# Altium PCB PCB1.PcbDoc
Units mm, origin at the board's own origin, x right, y up, seen from the top; angles counter-clockwise.
Board outline 98.42 x 98.3 mm, 2 copper layers (Top Layer, Bottom Layer); 126 components, 87 nets, 280 pads, 4 vias.
Unrouted connection lines stored in the file: 1.
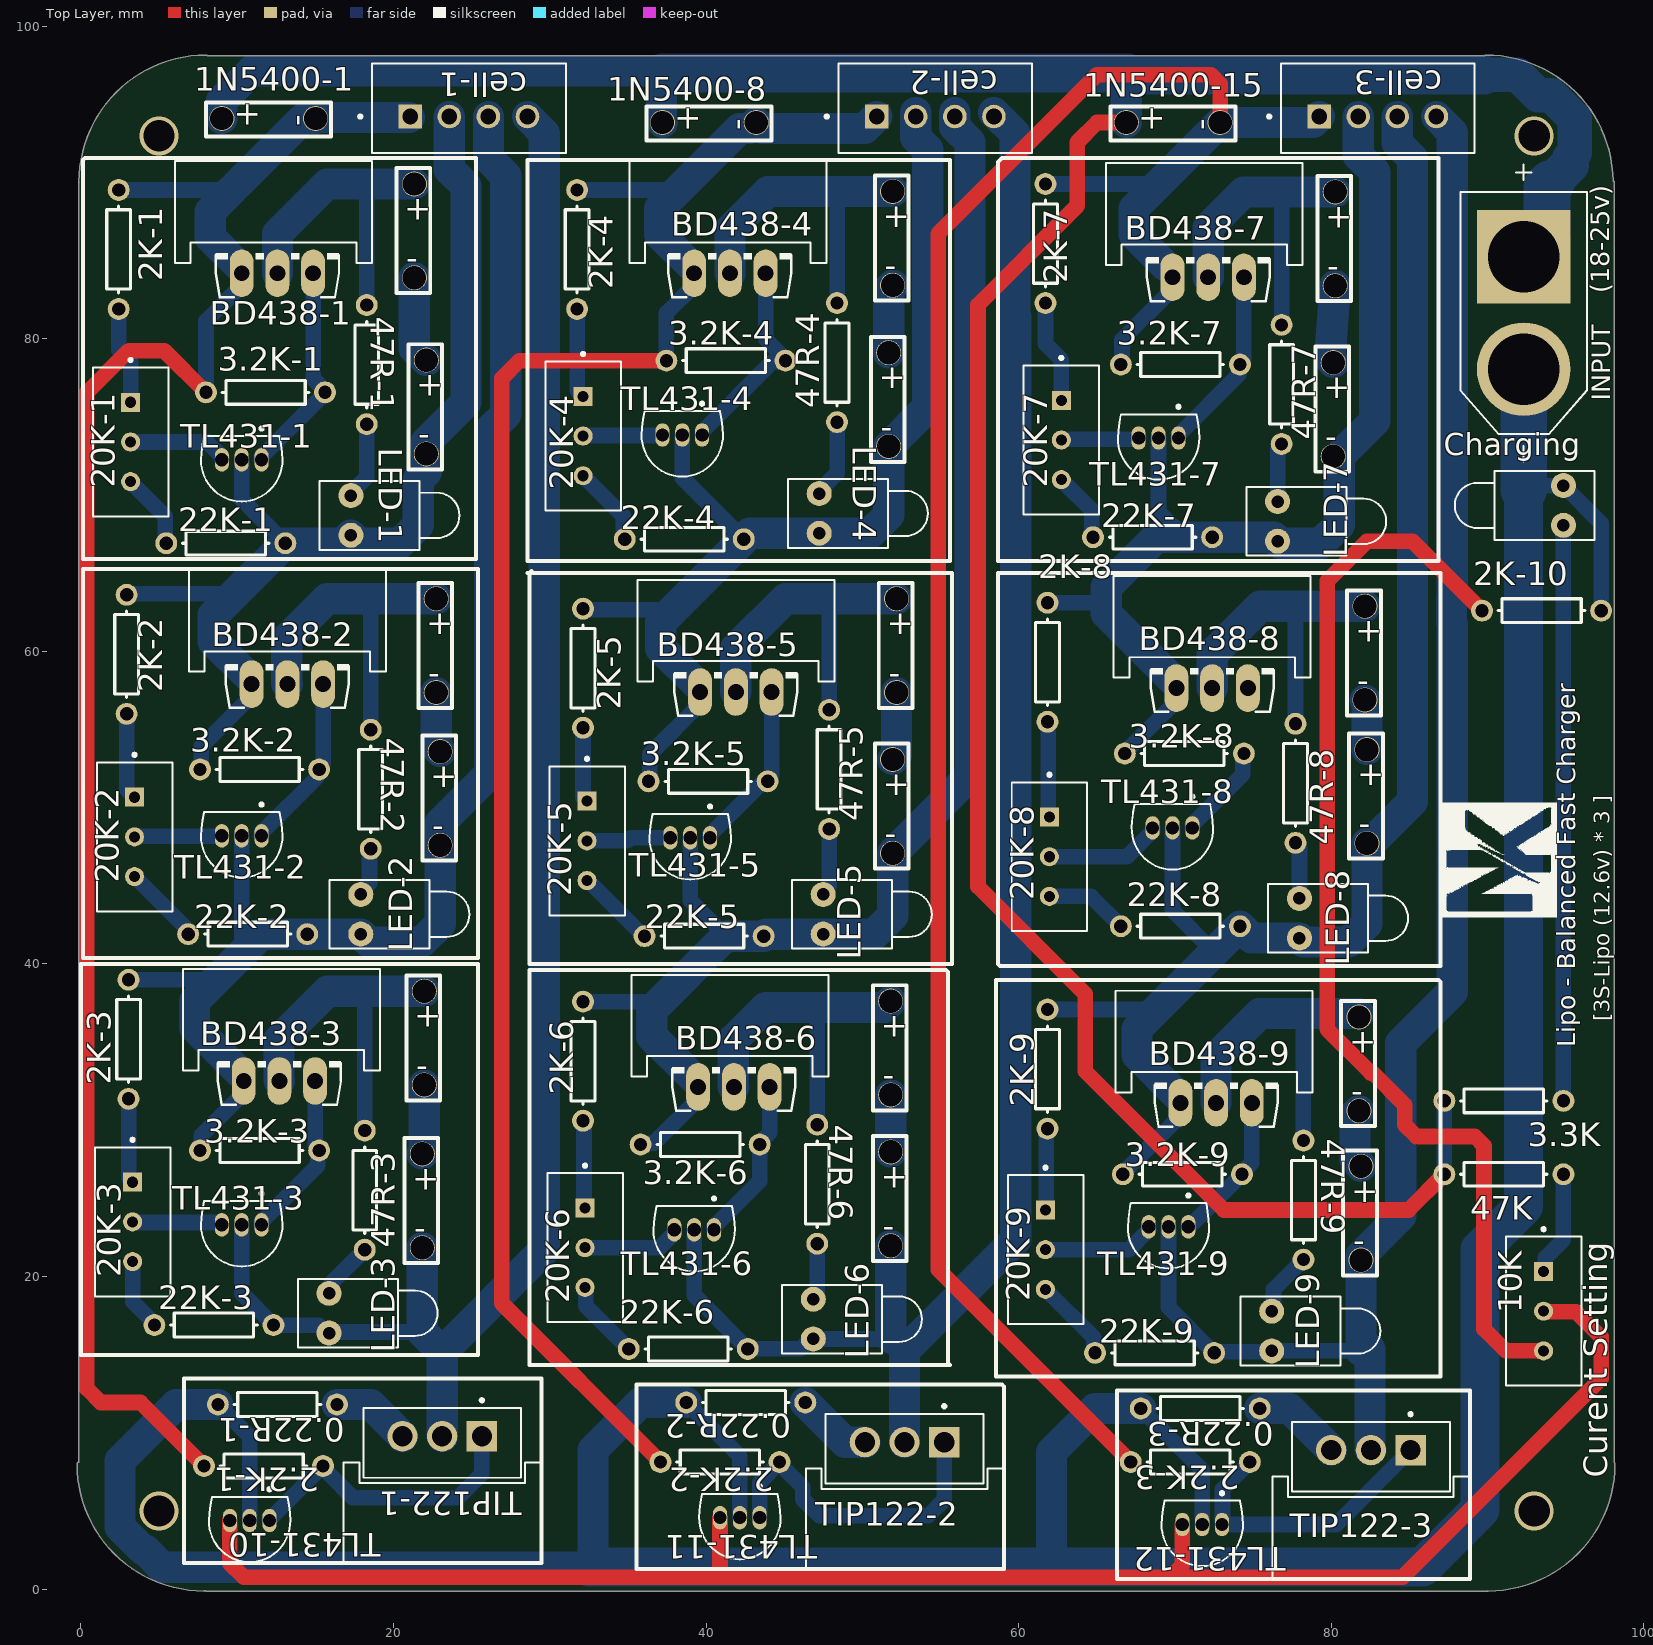
[diagram p0: Top Layer view]
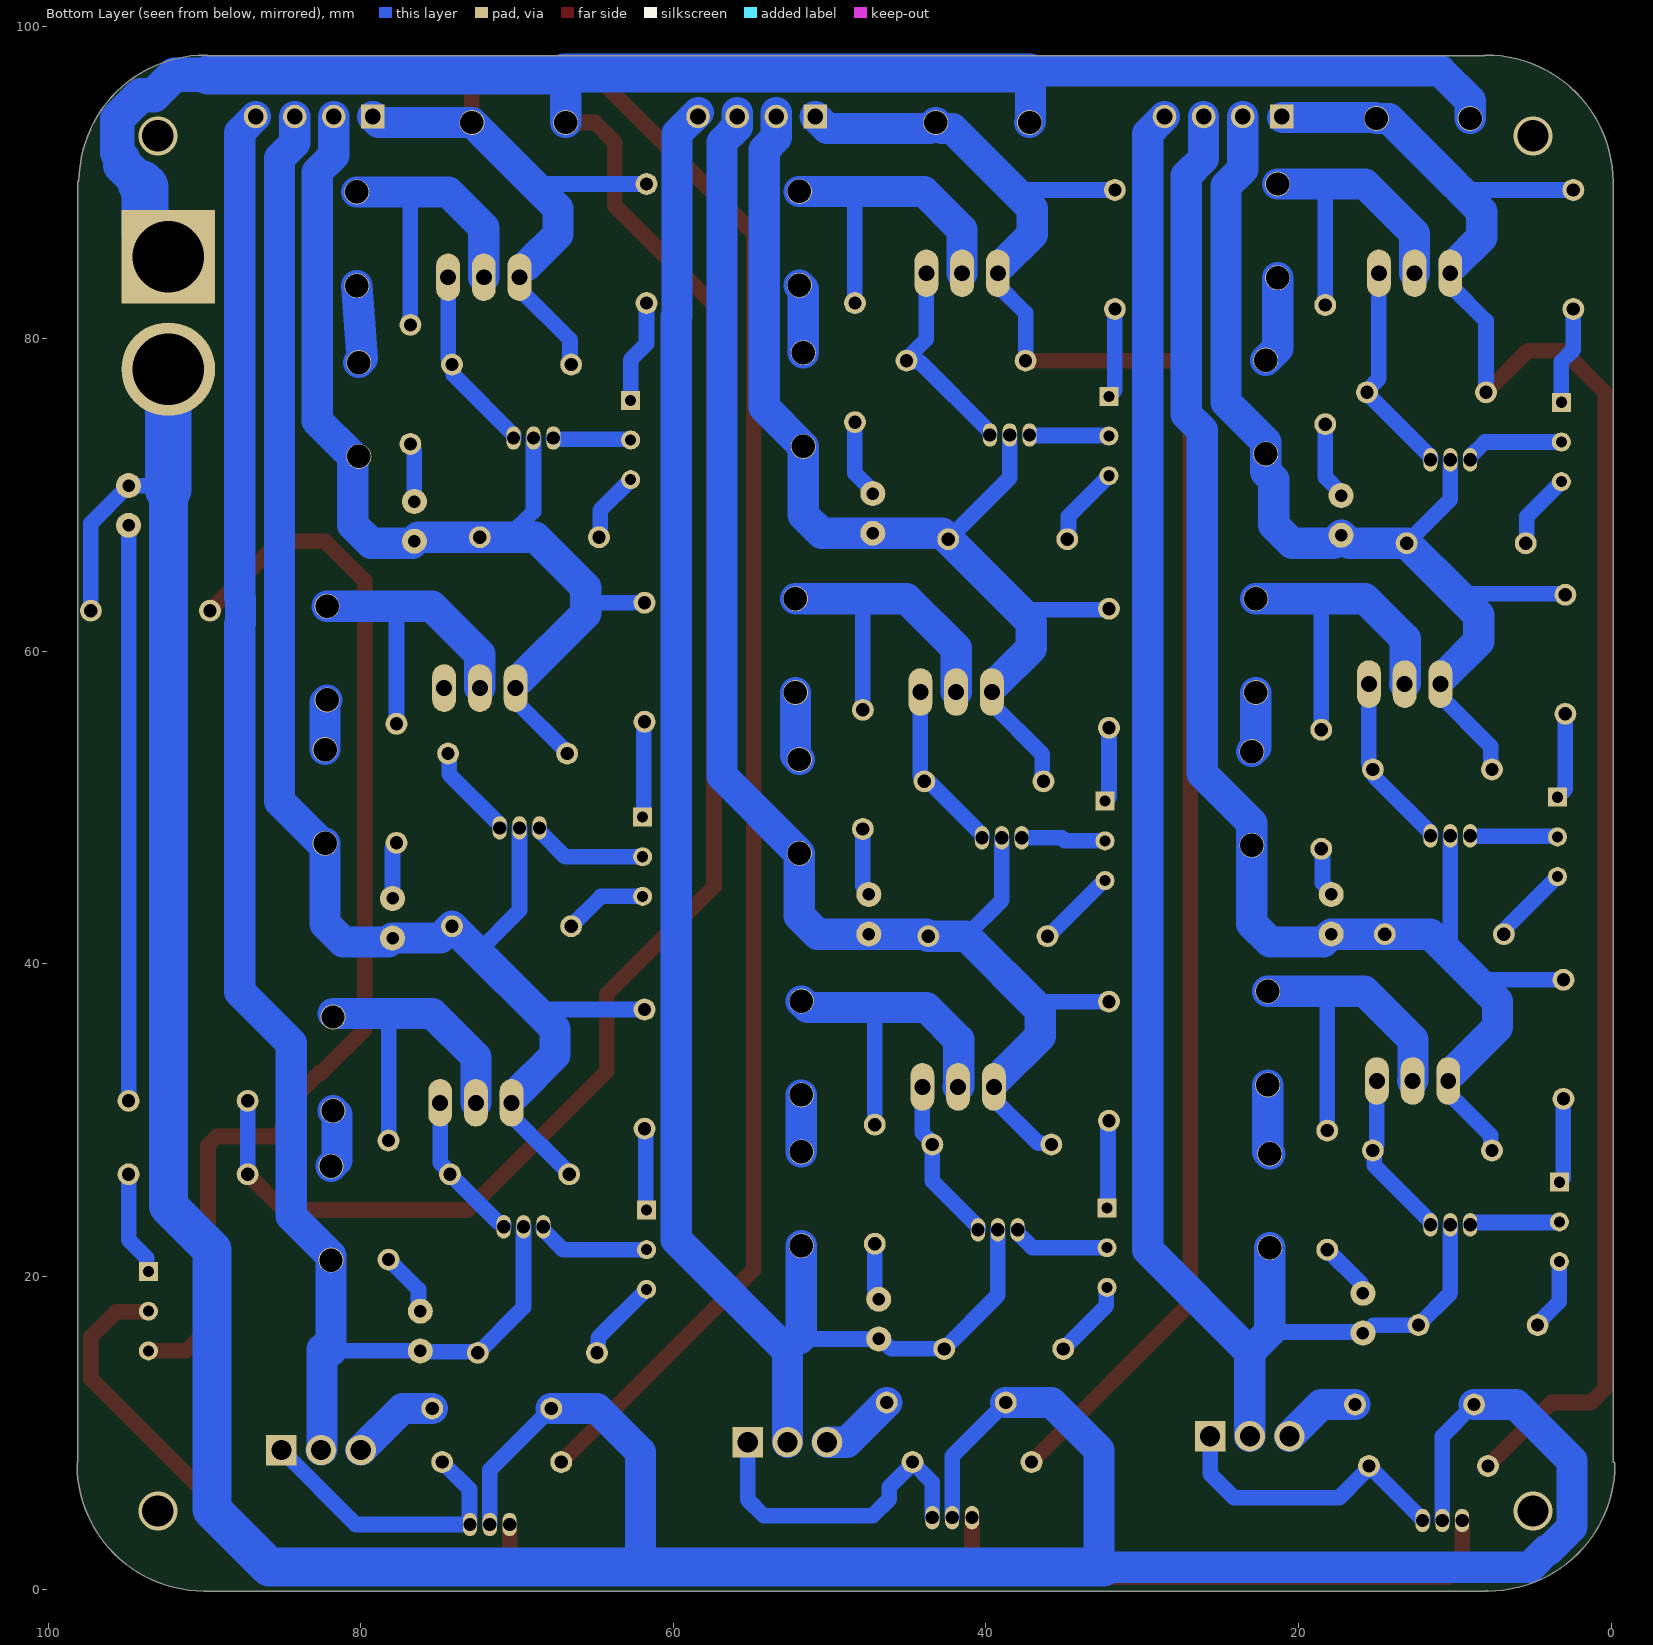
[diagram p1: Bottom Layer view, seen from below]

## Layer stack, top to bottom
Top Solder: solder mask 0.0102, Solder Resist, Dk 3.5
Top Layer: signal copper 0.0356
Dielectric 1: dielectric 0.32, FR-4, Dk 4.8
Bottom Layer: signal copper 0.0356
Bottom Solder: solder mask 0.0102, Solder Resist, Dk 3.5

## Board outline
7.874,-0.126 ccw(c7.874,0.001) 7.936,-0.11 ccw(c8,0) 8,-0.127 90,-0.127 ccw(c90,0) 90.024,-0.125 ccw(c90.043,0.001) 90.043,-0.126 ccw(c90.043,8.001) 98.17,8.001 ccw(c98.043,8.001) 98.127,8.096 98.127,90 ccw(c98,90) 98.043,90.12 ccw(c89.916,90.043) 89.916,98.17 ccw(c89.916,98.043) 89.821,98.127 8.096,98.127 ccw(c8.001,98.043) 8.001,98.17 ccw(c8.001,90.043) -0.126,90.043 ccw(c0.001,90.043) -0.125,90.024 ccw(c0,90) -0.127,90 -0.127,8.128 ccw(c-0.126,8.001) -0.253,8.001 ccw(c7.874,8.001)

## Design rules (kind name [scope] priority, off if disabled: settings)
Clearance [All] p1: gap=0.254 ignorepadtopadclearanceinfootprint=FALSE except(0: Arc-Hole Track-Hole SMDPad-Hole THPad-Hole Via-Hole Fill-Hole Poly-Hole Region-Hole Text-Hole)
PolygonConnect [All] p1: connectstyle=Relief reliefconductorwidth=0.254 reliefentries=4 polygonreliefangle="90 Angle" airgapwidth=0.254
RoutingVias [All] p1: holewidth=0.711 width=1.27 viastyle="Through Hole" minholewidth=0.711 minwidth=1.27 maxholewidth=0.711 maxwidth=1.27
SolderMaskExpansion [All] p1: expansion=0.102 istentingtop=FALSE
Width [All] p1: maxlimit=3 minlimit=0.254 preferedwidth=1 minimp=50.000000 maximp=50.000000 favimp=50.000000
30 further rules are at their usual default settings.

## Classes and differential pairs
component class Sheet2: 0.22R-1 0.22R-2 0.22R-3 1N5400-8 1N5400-15 2.2K-1 2.2K-2 2.2K-3 2K-1 2K-2 2K-3 2K-4 2K-5 2K-6 2K-7 2K-8 2K-9 2K-10 3.2K-1 3.2K-2 3.2K-3 3.2K-4 3.2K-5 3.2K-6 3.2K-7 3.2K-8 3.2K-9 3.3K 20K-1 20K-2 20K-3 20K-4 20K-5 20K-6 20K-7 20K-8 20K-9 22K-1 22K-2 22K-3 22K-4 22K-5 22K-6 22K-7 22K-8 22K-9 47K 47R-1 47R-2 47R-3 47R-4 47R-5 47R-6 47R-7 47R-8 47R-9 BD438-1 BD438-2 BD438-3 BD438-4 BD438-5 BD438-6 BD438-7 BD438-8 BD438-9 cell-1 cell-2 cell-3 Charging "Curent Setting" LED-1 LED-2 LED-3 LED-4 LED-5 LED-6 LED-7 LED-8 LED-9 TIP122-1 TIP122-2 TIP122-3 TL431-1 TL431-2 TL431-3 TL431-4 TL431-5 TL431-6 TL431-7 TL431-8 TL431-9 TL431-10 TL431-11 TL431-12

## Components (designator, comment, footprint, x,y, rotation, side; value= is the part's Value field where it differs from the comment)
0.22R-1 "" AXIAL-0.3 12.573,11.811 r0 top
0.22R-2 "" AXIAL-0.3 42.545,11.938 r0 top
0.22R-3 "" AXIAL-0.3 71.628,11.557 r0 top
1N5400-1 "" PCBComponent_1 9.017,94.107 r0 top
1N5400-2 "" PCBComponent_1 22.098,78.644 r270 top
1N5400-3 "" PCBComponent_1 21.336,89.916 r270 top
1N5400-4 "" PCBComponent_1 22.733,63.373 r270 top
1N5400-5 "" PCBComponent_1 22.987,53.594 r270 top
1N5400-6 "" PCBComponent_1 21.971,38.258 r270 top
1N5400-7 "" PCBComponent_1 21.844,27.844 r270 top
1N5400-8 "" PCBComponent_1 37.211,93.853 r0 top
1N5400-9 "" PCBComponent_1 51.943,89.439 r270 top
1N5400-10 "" PCBComponent_1 51.689,79.121 r270 top
1N5400-11 "" PCBComponent_1 52.197,63.373 r270 top
1N5400-12 "" PCBComponent_1 51.943,53.086 r270 top
1N5400-13 "" PCBComponent_1 51.816,37.623 r270 top
1N5400-14 "" PCBComponent_1 51.816,27.971 r270 top
1N5400-15 "" PCBComponent_1 66.898,93.853 r0 top
1N5400-16 "" PCBComponent_1 80.264,89.408 r270 top
1N5400-17 "" PCBComponent_1 80.137,78.486 r270 top
1N5400-18 "" PCBComponent_1 82.169,62.896 r270 top
1N5400-19 "" PCBComponent_1 82.296,53.721 r270 top
1N5400-20 "" PCBComponent_1 81.788,36.607 r270 top
1N5400-21 "" PCBComponent_1 81.915,27.051 r270 top
2.2K-1 "" AXIAL-0.3 11.684,7.874 r180 top
2.2K-2 "" AXIAL-0.3 40.894,8.128 r180 top
2.2K-3 "" AXIAL-0.3 70.993,8.128 r180 top
2K-1 "" AXIAL-0.3 2.413,85.725 r90 top
2K-2 "" AXIAL-0.3 2.921,59.817 r90 top
2K-3 "" AXIAL-0.3 3.048,35.179 r90 top
2K-4 "" AXIAL-0.3 31.75,85.725 r90 top
2K-5 "" AXIAL-0.3 32.131,58.928 r90 top
2K-6 "" AXIAL-0.3 32.131,33.782 r90 top
2K-7 "" AXIAL-0.3 61.722,86.106 r90 top
2K-8 "" AXIAL-0.3 61.849,59.309 r90 top
2K-9 "" AXIAL-0.3 61.849,33.274 r90 top
2K-10 "" AXIAL-0.3 93.472,62.611 r180 top
3.2K-1 "" AXIAL-0.3 11.811,76.581 r0 top
3.2K-2 "" AXIAL-0.3 11.43,52.451 r0 top
3.2K-3 "" AXIAL-0.3 11.43,28.067 r0 top
3.2K-4 "" AXIAL-0.3 41.275,78.613 r0 top
3.2K-5 "" AXIAL-0.3 40.132,51.689 r0 top
3.2K-6 "" AXIAL-0.3 39.624,28.448 r0 top
3.2K-7 "" AXIAL-0.3 70.358,78.359 r0 top
3.2K-8 "" AXIAL-0.3 70.612,53.467 r0 top
3.2K-9 "" AXIAL-0.3 70.485,26.543 r0 top
3.3K "" AXIAL-0.3 91.059,31.242 r180 top
20K-1 "" TRIM_3296W-FM1-502 3.175,73.406 r270 top
20K-2 "" TRIM_3296W-FM1-502 3.429,48.133 r270 top
20K-3 "" TRIM_3296W-FM1-502 3.302,23.495 r270 top
20K-4 "" TRIM_3296W-FM1-502 32.131,73.787 r270 top
20K-5 "" TRIM_3296W-FM1-502 32.385,47.879 r270 top
20K-6 "" TRIM_3296W-FM1-502 32.258,21.844 r270 top
20K-7 "" TRIM_3296W-FM1-502 62.738,73.533 r270 top
20K-8 "" TRIM_3296W-FM1-502 61.976,46.863 r270 top
20K-9 "" TRIM_3296W-FM1-502 61.722,21.717 r270 top
22K-1 "" AXIAL-0.3 9.271,66.929 r0 top
22K-2 "" AXIAL-0.3 10.668,41.91 r0 top
22K-3 "" AXIAL-0.3 8.509,16.891 r0 top
22K-4 "" AXIAL-0.3 38.608,67.183 r0 top
22K-5 "" AXIAL-0.3 39.878,41.783 r0 top
22K-6 "" AXIAL-0.3 38.862,15.367 r0 top
22K-7 "" AXIAL-0.3 68.58,67.31 r0 top
22K-8 "" AXIAL-0.3 70.358,42.418 r0 top
22K-9 "" AXIAL-0.3 68.707,15.113 r0 top
47K "" AXIAL-0.3 91.059,26.543 r180 top
47R-1 "" AXIAL-0.3 18.288,78.359 r270 top
47R-2 "" AXIAL-0.3 18.542,51.181 r270 top
47R-3 "" AXIAL-0.3 18.161,25.527 r270 top
47R-4 "" AXIAL-0.3 48.387,78.486 r270 top
47R-5 "" AXIAL-0.3 47.879,52.451 r270 top
47R-6 "" AXIAL-0.3 47.117,25.908 r270 top
47R-7 "" AXIAL-0.3 76.835,77.089 r270 top
47R-8 "" AXIAL-0.3 77.724,51.562 r270 top
47R-9 "" AXIAL-0.3 78.232,24.892 r270 top
BD438-1 "" TO126AV 12.573,85.471 r0 top
BD438-2 "" TO126AV 13.208,59.182 r0 top
BD438-3 "" TO126AV 12.7,33.782 r0 top
BD438-4 "" TO126AV 41.529,85.471 r0 top
BD438-5 "" TO126AV 41.91,58.674 r0 top
BD438-6 "" TO126AV 41.783,33.401 r0 top
BD438-7 "" TO126AV 72.136,85.217 r0 top
BD438-8 "" TO126AV 72.39,58.928 r0 top
BD438-9 "" TO126AV 72.644,32.385 r0 top
cell-1 "" JST_B4B-XH-A(LF)(SN) 24.825,94.759 r0 top
cell-2 "" JST_B4B-XH-A(LF)(SN) 54.677,94.759 r0 top
cell-3 "" JST_B4B-XH-A(LF)(SN) 82.991,94.759 r0 top
Charging "" LED-1 94.869,69.342 r180 top (schematic designator LED10)
"Curent Setting" "" TRIM_3296W-FM1-502 93.599,17.78 r270 top (schematic designator Curent(10K))
INPUT "" AMASS_XT60-M 92.329,81.661 r270 top
LED-1 "" LED-1 17.272,68.707 r0 top
LED-2 "" LED-1 17.907,43.18 r0 top
LED-3 "" LED-1 15.875,17.653 r0 top
LED-4 "" LED-1 47.244,68.834 r0 top
LED-5 "" LED-1 47.498,43.18 r0 top
LED-6 "" LED-1 46.863,17.272 r0 top
LED-7 "" LED-1 76.581,68.326 r0 top
LED-8 "" LED-1 77.978,42.926 r0 top
LED-9 "" LED-1 76.2,16.51 r0 top
TIP122-1 "" TO254P1009X445X1985-3 23.114,9.779 r180 top
TIP122-2 "" TO254P1009X445X1985-3 52.705,9.398 r180 top
TIP122-3 "" TO254P1009X445X1985-3 82.55,8.89 r180 top
TL431-1 "" TO-92 10.287,71.688 r180 top
TL431-2 "" TO-92 10.287,47.625 r180 top
TL431-3 "" TO-92 10.287,22.733 r180 top
TL431-4 "" TO-92 38.481,73.279 r180 top
TL431-5 "" TO-92 38.989,47.498 r180 top
TL431-6 "" TO-92 39.243,22.412 r180 top
TL431-7 "" TO-92 68.961,73.085 r180 top
TL431-8 "" TO-92 69.85,48.133 r180 top
TL431-9 "" TO-92 69.596,22.606 r180 top
TL431-10 "" TO-92 10.795,3.81 r180 top
TL431-11 "" TO-92 42.164,3.997 r180 top
TL431-12 "" TO-92 71.755,3.556 r180 top
? "Comment" HSINK_SK_95_25_STS_TO_220 82.55,3.302 r180 top
? "Comment" HSINK_SK_95_25_STS_TO_220 52.705,3.81 r180 top
? "Comment" HSINK_SK_95_25_STS_TO_220 23.114,4.191 r180 top
? "Comment" HSINK_SK_95_25_STS_TO_220 72.517,35.687 r0 top
? "Comment" HSINK_SK_95_25_STS_TO_220 41.529,36.703 r0 top
? "Comment" HSINK_SK_95_25_STS_TO_220 12.827,37.084 r0 top
? "Comment" HSINK_SK_95_25_STS_TO_220 72.39,62.23 r0 top
? "Comment" HSINK_SK_95_25_STS_TO_220 41.91,61.976 r0 top
? "Comment" HSINK_SK_95_25_STS_TO_220 13.208,62.611 r0 top
? "Comment" HSINK_SK_95_25_STS_TO_220 71.882,88.646 r0 top
? "Comment" HSINK_SK_95_25_STS_TO_220 41.402,88.773 r0 top
? "Comment" HSINK_SK_95_25_STS_TO_220 12.319,88.773 r0 top

## Footprints (in the part's own frame and the unit in brackets; to place one, negate y for a bottom-side part, rotate by r counter-clockwise, add the part's x,y. Pads: shape width x height; smd on the part's side, far side on the other; paste and mask are expansions set on the pad)
AMASS_XT60-M [mm]
  round 6 hole 4.55: N(3.6,0)
  rect 6x6 / inner round 6 / far side rect 6x6 hole 4.55: P(-3.6,0)
  silkscreen extent -9.5,-4.05 9.5,4.05, body extent -4.05,0 4.05,20.5, height 7.75
AXIAL-0.3 [mm] "Axial Device, Thru-Hole; 2 Leads; 0.3 in Pin Spacing"
  round 1.4 hole 0.85: 1(-3.81,0) 2(3.81,0)
  silkscreen extent -2.77,-0.76 2.77,0.76
HSINK_SK_95_25_STS_TO_220 [mm]
  round 0 all layers, no hole: 1(0,0)
  silkscreen extent -6.3,-3.9 6.3,2.6, body extent -6.3,-3.9 6.3,2.6, height 25
JST_B4B-XH-A(LF)(SN) [mm]
  rect 1.508x1.508 / inner round 1.508 / far side rect 1.508x1.508 hole 1: 1(-3.75,-0.525)
  round 1.508 hole 1: 2(-1.25,-0.525) 3(1.25,-0.525) 4(3.75,-0.525)
  silkscreen extent -7.05,-2.88 6.2,2.88, body extent -6.2,-2.88 6.2,2.88, height 7
LED-1 [mm] "LED; 2 Leads"
  round 1.6 hole 0.8: 1(0,1.27) 2(0,-1.27)
  silkscreen extent -2,-2.2 6.95,2.2
PCBComponent_1 [mm]
  round 1.6 hole 1.5: 1(0,0) 2(6,0)
  silkscreen extent -1.02,-1.14 6.98,1.02
TO126AV [mil]
  oval 60x120 hole 40: B(90,-50) C(0,-50) E(-90,-50)
  silkscreen extent -155,-110 155,0
TO254P1009X445X1985-3 [mm]
  rect 1.94x1.94 hole 1.29: 1(-2.54,0)
  round 1.94 hole 1.29: 2(0,0) 3(2.54,0)
  silkscreen extent -5.05,-2.4 5.05,2.66, body extent -5.05,-1.79 5.05,2.65, height 19.84
TO-92 [mm]
  oval 0.9x1.5 hole 0.85: 1(-1.27,-0.575) 2(0,-0.575) 3(1.27,-0.575)
  silkscreen extent -2.61,-2.67 2.61,2.09
TRIM_3296W-FM1-502 [mm]
  rect 1.218x1.218 hole 0.71: 1(-2.54,0)
  round 1.218 hole 0.71: 2(0,0) 3(2.54,0)
  silkscreen extent -5.35,-2.41 4.76,2.42

## Part data
0.22R-1 0.22R-2 0.22R-3 2.2K-1 2.2K-2 2.2K-3 2K-1 2K-2 2K-3 2K-4 2K-5 2K-6 2K-7 2K-8 2K-9 2K-10 3.2K-1 3.2K-2 3.2K-3 3.2K-4 3.2K-5 3.2K-6 3.2K-7 3.2K-8 3.2K-9 3.3K 22K-1 22K-2 22K-3 22K-4 22K-5 22K-6 22K-7 22K-8 22K-9 47K 47R-1 47R-2 47R-3 47R-4 47R-5 47R-6 47R-7 47R-8 47R-9: library part Res1, "Resistor", LatestRevisionDate=17-Jul-2002, LatestRevisionNote="Re-released for DXP Platform.", PackageDescription="Axial Device, Thru-Hole; 2 Leads; 0.3 in Pin Spacing", PackageReference=AXIAL-0.3, Published=8-Jun-2000, Publisher="Altium Limited"
1N5400-1 1N5400-2 1N5400-3 1N5400-4 1N5400-5 1N5400-6 1N5400-7 1N5400-8 1N5400-9 1N5400-10 1N5400-11 1N5400-12 1N5400-13 1N5400-14 1N5400-15 1N5400-16 1N5400-17 1N5400-18 1N5400-19 1N5400-20 1N5400-21: library part 1N5400-
20K-1 20K-2 20K-3 20K-4 20K-5 20K-6 20K-7 20K-8 20K-9 "Curent Setting": library part 3296W-FM1-502, "Trimmer Resistors - Through Hole", Package=None, Availability=Warning, Check_prices=https://www.snapeda.com/parts/3296W-FM1-502/Bourns/view-part/3211169/?ref=eda, MF=Bourns, MP=3296W-FM1-502, Price=None, SnapEDA_Link=https://www.snapeda.com/parts/3296W-FM1-502/Bourns/view-part/3211169/?ref=snap
BD438-1 BD438-2 BD438-3 BD438-4 BD438-5 BD438-6 BD438-7 BD438-8 BD438-9: library part BD438, "Bipolar (BJT) Transistor PNP 45V 4A 3MHz 36W Through Hole SOT-32-3", Package="TO-126 STMicroelectronics", Availability="In Stock", Check_prices=https://www.snapeda.com/parts/BD438/Onsemi/view-part/496837/?ref=eda, MF=ON, MP=BD438, Price=None, Purchase-URL=https://pricing.snapeda.com/search/part/BD438/?ref=eda, SnapEDA_Link=https://www.snapeda.com/parts/BD438/Onsemi/view-part/496837/?ref=snap
cell-1 cell-2 cell-3: library part B4B-XH-A(LF)(SN), "Connector Header Through Hole 4 position 0.098 (2.50mm)", Package=None, Availability="In Stock", Check_prices=https://www.snapeda.com/parts/B4B-XH-A(LF)(SN)/JST+Sales+America+Inc./view-part/?ref=eda, MF="JST Sales", MP=B4B-XH-A(LF)(SN), Price=None, Purchase-URL=https://pricing.snapeda.com/search/part/B4B-XH-A(LF)(SN)/?ref=eda, SnapEDA_Link=https://www.snapeda.com/parts/B4B-XH-A(LF)(SN)/JST+Sales+America+Inc./view-part/?ref=snap
Charging LED-1 LED-2 LED-3 LED-4 LED-5 LED-6 LED-7 LED-8 LED-9: library part LED1, "Typical RED GaAs LED", LatestRevisionDate=08-Jul-2005, LatestRevisionNote="Mech Layer 1 removed.", PackageDescription="LED; 2 Leads", PackageReference=LED-1, Published=8-Jun-2000, Publisher="Altium Limited"
INPUT: library part XT60-M, "Plug; DC supply; XT60; male; PIN: 2; for cable; soldered; 30A; 500V", Package=None, Availability="Not in stock", Check_prices=https://www.snapeda.com/parts/XT30UPB-M/AMASS/view-part/?ref=eda, MF=amass, MP=XT30UPB-M, Price=None, SnapEDA_Link=https://www.snapeda.com/parts/XT30UPB-M/AMASS/view-part/?ref=snap
TIP122-1 TIP122-2 TIP122-3: library part TIP122G, "Bipolar (BJT) Transistor NPN - Darlington 100V 5A 2W Through Hole TO-220AB", Package=None, Availability=Good, Check_prices=https://www.snapeda.com/parts/TIP122G/ON%20Semiconductor/view-part/385313/?ref=eda, MF="ON Semiconductor", MP=TIP122G, Price=None, Purchase-URL=https://pricing.snapeda.com/search/part/TIP122G/?ref=eda, SnapEDA_Link=https://www.snapeda.com/parts/TIP122G/ON%20Semiconductor/view-part/385313/?ref=snap
TL431-1 TL431-2 TL431-3 TL431-4 TL431-5 TL431-6 TL431-7 TL431-8 TL431-9 TL431-10 TL431-11 TL431-12: library part TL431CLP, "Adjustable precision shunt regulator 3-TO-92 0 to 70", Package=None, Availability=Unavailable, MP=TL431CLP, Price=None

## Via types
v1: diameter 2.5, hole 2, Top Layer to Bottom Layer, 4 vias

## Nets (pads, with @x,y where several pads share a name; then routed paths per layer and width w, separated by ;. In a path a pad name is that pad's centre, name@x,y a point inside that pad or via, vN(x,y) a via of type N, cw(c..) or ccw(c..) an arc to the next point about the centre after c; other vN are vias at no path point)
Net0.22R-1_1: 0.22R-1.1 0.22R-2.1 0.22R-3.1 2K-10.1 Charging.2 INPUT.N TL431-10.2 TL431-11.2 TL431-12.2 | length 242.6
  Bottom Layer w1: 0.22R-1.1 10.795,9.779 TL431-10.2 ; 0.22R-2.1 42.164,8.509 TL431-11.2 ; 0.22R-3.1 71.755,7.62 TL431-12.2 ; 92.329,70.358 92.569,70.598 93.853,70.598 94.855,70.598 Charging.2 97.282,68.199 2K-10.1
  Bottom Layer w2: 0.22R-1.1 6.096,11.811 2.496,8.211 2.496,3.963 3.963,2.496 4.108,2.496 5.207,1.397 32.512,1.397 32.766,1.651 32.766,8.89 35.814,11.938 0.22R-2.1 ; 61.976,1.397 62.103,1.524 62.103,8.763 64.897,11.557 0.22R-3.1
  Bottom Layer w2.5: 32.512,1.397 61.976,1.397 85.852,1.397 89.535,5.08 89.535,21.717 92.329,24.511 92.329,70.358
  Bottom Layer w3: 92.329,70.358 INPUT.N
Net0.22R-1_2: 0.22R-1.2 TIP122-1.3 | length 5
  Bottom Layer w2: 0.22R-1.2 18.542,11.811 TIP122-1.3
Net0.22R-2_2: 0.22R-2.2 TIP122-2.3 | length 4.9
  Bottom Layer w2: 0.22R-2.2 48.895,9.398 TIP122-2.3
Net0.22R-3_2: 0.22R-3.2 TIP122-3.3 | length 5.7
  Bottom Layer w2: 0.22R-3.2 77.343,11.557 TIP122-3.3
Net1N5400-1_1: 1N5400-1.1 1N5400-8.1 1N5400-15.1 3.3K.2 47K.2 INPUT.P | length 207.6
  Top Layer w1: 1N5400-15.1 65.024,93.853 63.754,92.583 63.754,88.519 57.404,82.169 57.404,44.958 64.262,38.1 64.262,33.147 73.152,24.257 84.963,24.257 47K.2
  Bottom Layer w1: 37.084,97.155 37.211,97.028 ; 66.898,96.061 67.484,96.647 66.976,97.155 ; 47K.2 3.3K.2
  Bottom Layer w2: 1N5400-1.1 9.017,95.25 10.922,97.155 37.084,97.155 ; 37.148,97.091 37.148,93.916 1N5400-8.1 ; 1N5400-15.1 66.898,96.061
  Bottom Layer w2.2: 89.789,96.901 91.948,96.901 93.245,95.604 94.079,95.604 95.604,94.079 95.604,91.921 95.25,91.567 95.25,91.137
  Bottom Layer w2.5: 37.211,97.028 66.967,97.028 ; 67.23,96.901 89.789,96.901 ; 94.079,89.966 95.25,91.137
  Bottom Layer w3: INPUT.P 93.829,86.761 93.829,89.716 94.079,89.966
Net1N5400-1_2: 1N5400-1.2 2.2K-1.2 2K-1.2 3.2K-1.1 BD438-1.E cell-1.1 | length 118.5
  Top Layer w1: 2.2K-1.2 3.81,11.938 1.27,11.938 0.381,12.827 0.381,76.581 3.048,79.248 5.334,79.248 3.2K-1.1
  Bottom Layer w1: 2K-1.2@2.365,89.487 2K-1.2 9.652,89.535 10.033,89.916 ; 3.2K-1.1 8.001,81.153 10.287,83.439 BD438-1.E ; 1N5400-1.2 1N5400-1.2@15.081,94.17 ; cell-1.1@21.011,94.17 cell-1.1
  Bottom Layer w2: 9.652,89.535 8.274,88.157 8.274,86.5 BD438-1.E@10.049,84.725 ; 10.033,89.916 14.224,94.107 1N5400-1.2 ; 1N5400-1.2@15.081,94.17 cell-1.1@21.011,94.17
Net1N5400-2_1: 1N5400-2.1 1N5400-3.2 | length 5.6
  Bottom Layer w2: 1N5400-3.2 21.336,79.406 1N5400-2.1
Net1N5400-2_2: 1N5400-2.2 2K-2.2 3.2K-2.1 22K-1.2 BD438-2.E cell-1.2 LED-1.2 TL431-1.2 | length 68.8
  Bottom Layer w1: 2K-2.2 2.984,63.691 9.842,63.691 ; 3.2K-2.1 7.697,52.528 7.697,53.925 10.922,57.15 BD438-2.E ; TL431-1.2 10.287,69.723 22K-1.2
  Bottom Layer w2: BD438-2.E@10.684,58.436 8.464,60.656 8.464,62.312 9.842,63.691 22K-1.2 16.764,66.929 LED-1.2 17.78,66.929 20.418,66.929 21.59,68.101 21.59,70.993 22.098,71.501 22.098,73.406 24.638,75.946 24.638,89.802 23.575,90.865 cell-1.2
Net1N5400-3_1: 1N5400-3.1 47R-1.1 BD438-1.C | length 20.4
  Bottom Layer w1: 47R-1.1 18.288,89.916
  Bottom Layer w2: BD438-1.C 12.573,86.741 15.748,89.916 18.288,89.916 1N5400-3.1
Net1N5400-4_1: 1N5400-4.1 47R-2.1 BD438-2.C | length 21.9
  Bottom Layer w1: 47R-2.1 18.542,63.373
  Bottom Layer w2: BD438-2.C 13.176,57.944 13.176,60.806 15.743,63.373 18.542,63.373 1N5400-4.1
Net1N5400-4_2: 1N5400-4.2 1N5400-5.1 | length 3.9
  Bottom Layer w2: 1N5400-4.2 22.733,53.848 1N5400-5.1
Net1N5400-5_2: 1N5400-5.2 2K-3.2 3.2K-3.1 22K-2.2 BD438-3.E cell-1.3 LED-2.2 TL431-2.2 | length 96
  Bottom Layer w1: 2K-3.2 7.747,38.989 8.191,38.544 ; 3.2K-3.1 7.697,28.144 7.697,29.033 10.414,31.75 BD438-3.E ; TL431-2.2 10.287,41.656 10.795,41.148
  Bottom Layer w2: BD438-3.E@10.176,33.036 7.258,35.954 7.258,37.611 8.191,38.544 10.795,41.148 11.557,41.91 22K-2.2 LED-2.2 18.415,41.402 21.815,41.402 22.987,42.574 1N5400-5.2 22.987,49.022 26.162,52.197 26.162,74.155 27.178,75.171 27.178,90.449 26.075,91.552 cell-1.3
Net1N5400-6_1: 1N5400-6.1 47R-3.1 BD438-3.C | length 22.4
  Bottom Layer w1: 17.653,38.258 18.161,37.75 47R-3.1
  Bottom Layer w2: BD438-3.C 12.668,32.544 12.668,35.152 15.774,38.258 17.653,38.258 1N5400-6.1
Net1N5400-6_2: 1N5400-6.2 1N5400-7.1 | length 4.5
  Bottom Layer w2: 1N5400-7.1 21.971,27.971 1N5400-6.2
Net1N5400-7_2: 1N5400-7.2 22K-3.2 cell-1.4 LED-3.2 TIP122-1.2 TL431-3.2 | length 111.8
  Bottom Layer w1: TL431-3.2 10.287,18.923 22K-3.2 15.205,16.891 15.713,16.383 LED-3.2 15.938,16.447 21.844,16.447
  Bottom Layer w2: 1N5400-7.2 21.844,16.447 23.114,15.176 ; TIP122-1.2 23.114,15.176 ; cell-1.4 29.654,93.155 29.654,21.717 23.114,15.176
Net1N5400-8_2: 1N5400-8.2 2.2K-2.2 2K-4.2 3.2K-4.1 BD438-4.E cell-2.1 | length 117.9
  Top Layer w1: 2.2K-2.2 26.924,18.288 26.924,77.47 28.067,78.613 3.2K-4.1
  Bottom Layer w1: 2K-4.2 38.227,89.535 38.417,89.725 ; 3.2K-4.1 37.465,81.661 39.243,83.439 BD438-4.E
  Bottom Layer w2: 38.227,89.535 37.039,88.347 37.039,86.691 BD438-4.E@39.005,84.725 ; 38.417,89.725 42.164,93.472 42.83,93.472 1N5400-8.2 ; 1N5400-8.2@43.592,93.472 50.165,93.472 cell-2.1
Net1N5400-9_1: 1N5400-9.1 47R-4.1 BD438-4.C | length 21.6
  Bottom Layer w1: 47.879,89.439 48.387,88.931 47R-4.1
  Bottom Layer w2: BD438-4.C 41.529,86.995 43.973,89.439 47.879,89.439 1N5400-9.1
Net1N5400-9_2: 1N5400-9.2 1N5400-10.1 | length 4.4
  Bottom Layer w2: 1N5400-10.1 51.689,83.185 1N5400-9.2
Net1N5400-10_2: 1N5400-10.2 2K-5.2 3.2K-5.1 22K-4.2 BD438-5.E cell-2.2 LED-4.2 TL431-4.2 | length 70.6
  Bottom Layer w1: 2K-5.2 32.194,62.674 37.91,62.674 ; 3.2K-5.1 36.399,51.766 36.399,53.417 39.624,56.642 BD438-5.E ; TL431-4.2 38.481,71.12 22K-4.2
  Bottom Layer w2: BD438-5.E@39.386,57.928 37.103,60.211 37.103,61.868 37.91,62.674 22K-4.2 42.799,67.564 LED-4.2 50.517,67.564 51.689,68.736 1N5400-10.2 54.197,75.629 54.197,92.107 53.42,92.884 cell-2.2@53.42,94.488
Net1N5400-11_1: 1N5400-11.1 47R-5.1 BD438-5.C | length 21.5
  Bottom Layer w1: 47R-5.1 47.879,63.373
  Bottom Layer w2: BD438-5.C 41.91,60.203 45.08,63.373 47.879,63.373 1N5400-11.1
Net1N5400-11_2: 1N5400-11.2 1N5400-12.1 | length 4.4
  Bottom Layer w2: 1N5400-12.1 52.197,53.34 1N5400-11.2
Net1N5400-12_2: 1N5400-12.2 2K-6.2 3.2K-6.1 22K-5.2 BD438-6.E cell-2.3 LED-5.2 TL431-5.2 | length 94.8
  Bottom Layer w1: 2K-6.2 35.979,37.592 36.531,37.039 ; 3.2K-6.1 35.891,28.525 36.653,28.525 39.497,31.369 BD438-6.E ; TL431-5.2 38.989,44.069 41.275,41.783
  Bottom Layer w2: BD438-6.E@39.259,32.655 36.531,35.383 36.531,37.039 41.275,41.783 22K-5.2 43.815,41.91 LED-5.2 50.771,41.91 51.943,43.082 1N5400-12.2 56.896,52.039 56.896,92.596 55.92,93.572 cell-2.3@55.92,94.488
Net1N5400-13_1: 1N5400-13.1 47R-6.1 BD438-6.C | length 21.7
  Bottom Layer w1: 47R-6.1 47.117,37.084 47.244,37.211
  Bottom Layer w2: BD438-6.C 41.751,32.163 41.751,35.152 43.81,37.211 47.244,37.211 51.404,37.211 1N5400-13.1
Net1N5400-13_2: 1N5400-13.2 1N5400-14.1 | length 3.7
  Bottom Layer w2: 1N5400-14.1 1N5400-13.2
Net1N5400-14_2: 1N5400-14.2 22K-6.2 cell-2.4 LED-6.2 TIP122-2.2 TL431-6.2 | length 114.3
  Bottom Layer w1: TL431-6.2 39.243,18.796 22K-6.2 46.066,15.367 46.701,16.002 LED-6.2 51.943,16.002 52.705,15.24
  Bottom Layer w2: 1N5400-14.2 51.816,16.129 51.943,16.002 ; TIP122-2.2 52.705,15.24 59.817,22.352 59.817,81.438 59.768,81.487 59.768,93.14 cell-2.4@58.42,94.488
Net1N5400-15_2: 1N5400-15.2 2.2K-3.2 2K-7.2 3.2K-7.1 BD438-7.E cell-3.1 | length 141.5
  Top Layer w1: 2.2K-3.2 54.864,20.447 54.864,86.741 65.024,96.901 72.312,96.901 72.898,96.315 1N5400-15.2
  Bottom Layer w1: 2K-7.2 68.707,89.916 68.834,89.789 ; 3.2K-7.1 66.625,78.436 66.625,79.96 69.85,83.185 BD438-7.E
  Bottom Layer w2: BD438-7.E@69.374,84.709 67.392,86.691 67.392,88.347 68.834,89.789 1N5400-15.2 78.86,93.853 cell-3.1
Net1N5400-16_1: 1N5400-16.1 47R-7.1 BD438-7.C | length 20.8
  Bottom Layer w1: 76.708,89.408 76.835,89.281 47R-7.1
  Bottom Layer w2: BD438-7.C 72.136,87.127 74.417,89.408 76.708,89.408 1N5400-16.1
Net1N5400-16_2: 1N5400-16.2 1N5400-17.1 | length 5
  Bottom Layer w2: 1N5400-17.1 79.917,78.742 1N5400-16.2
Net1N5400-17_2: 1N5400-17.2 2K-8.2 3.2K-8.1 22K-7.2 BD438-8.E cell-3.2 LED-7.2 TL431-7.2 | length 68.7
  Bottom Layer w1: 2K-8.2 64.929,63.119 65.614,62.434 ; 3.2K-8.1 66.802,53.53 70.104,56.832 BD438-8.E ; TL431-7.2 68.961,68.961 70.612,67.31
  Bottom Layer w2: BD438-8.E@69.866,58.182 65.614,62.434 65.614,64.09 68.834,67.31 70.612,67.31 22K-7.2 76.327,67.31 76.708,66.929 79.346,66.929 80.518,68.101 80.518,72.486 82.804,74.772 82.804,90.678 81.741,91.741 cell-3.2
Net1N5400-18_1: 1N5400-18.1 47R-8.1 BD438-8.C | length 21.1
  Bottom Layer w1: 76.962,62.896 77.724,62.134 47R-8.1
  Bottom Layer w2: BD438-8.C 72.39,59.817 75.469,62.896 76.962,62.896 1N5400-18.1
Net1N5400-18_2: 1N5400-18.2 1N5400-19.1 | length 3.2
  Bottom Layer w2: 1N5400-18.2 82.296,56.769 1N5400-19.1
Net1N5400-19_2: 1N5400-19.2 2K-9.2 3.2K-9.1 22K-8.2 BD438-9.E cell-3.3 LED-8.2 TL431-8.2 | length 99
  Bottom Layer w1: 2K-9.2 68.453,37.084 68.644,36.893 ; 3.2K-9.1 66.675,26.607 70.358,30.29 BD438-9.E ; TL431-8.2 69.85,43.434 72.517,40.767
  Bottom Layer w2: BD438-9.E@70.12,31.639 67.583,34.176 67.583,35.833 68.644,36.893 72.517,40.767 22K-8.2 74.93,41.656 LED-8.2 78.232,41.402 81.124,41.402 82.296,42.574 1N5400-19.2 82.519,47.721 85.217,50.419 85.217,91.567 84.241,92.543 cell-3.3
Net1N5400-20_1: 1N5400-20.1 47R-9.1 BD438-9.C | length 21.5
  Bottom Layer w1: 77.851,36.83 78.232,36.449 47R-9.1
  Bottom Layer w2: BD438-9.C 72.644,34.041 75.433,36.83 77.851,36.83 1N5400-20.1@81.788,36.83
Net1N5400-20_2: 1N5400-20.2 1N5400-21.1 | length 3.8
  Bottom Layer w2: 1N5400-20.2 81.534,30.353 81.534,27.432 1N5400-21.1
Net1N5400-21_2: 1N5400-21.2 22K-9.2 cell-3.4 LED-9.2 TIP122-3.2 TL431-9.2 | length 107.7
  Bottom Layer w1: TL431-9.2 69.596,18.034 22K-9.2 72.581,15.176 76.136,15.176 LED-9.2 82.362,15.24 82.489,15.367
  Bottom Layer w2: 81.915,15.24 81.915,21.336 84.455,23.876 84.455,34.925 87.757,38.227 87.757,61.753 87.708,61.802 87.708,63.42 87.757,63.469 87.757,93.218 cell-3.4 ; 82.489,15.367 82.489,8.951 TIP122-3.2
Net2.2K-1_1: 2.2K-1.1 TIP122-1.1 TL431-10.1 | length 19.1
  Bottom Layer w1: TL431-10.1 12.065,4.585 12.115,4.635 12.255,4.635 2.2K-1.1 15.494,7.766 16.692,6.568 16.692,6.549 17.399,5.842 24.13,5.842 25.654,7.366 TIP122-1.1
Net2.2K-2_1: 2.2K-2.1 TIP122-2.1 TL431-11.1 | length 20.6
  Bottom Layer w1: TL431-11.1 43.434,6.822 2.2K-2.1@44.704,8.092 ; 2.2K-2.1 2.2K-2.1@44.704,8.092 ; TIP122-2.1 55.245,5.715 54.229,4.699 47.244,4.699 46.195,5.748 46.195,6.529 44.704,8.02 2.2K-2.1@44.704,8.092
Net2.2K-3_1: 2.2K-3.1 TIP122-3.1 TL431-12.1 | length 18.8
  Bottom Layer w1: 2.2K-3.1 73.056,6.381 73.056,4.162 TL431-12.1 80.331,4.131 TIP122-3.1
Net2K-1_1: 2K-1.1 20K-1.1 | length 6.3
  Bottom Layer w1: 2K-1.1 2.413,79.312 3.175,78.55 20K-1.1
Net2K-2_1: 2K-2.1 20K-2.1 | length 5.5
  Bottom Layer w1: 2K-2.1 2.921,51.181 20K-2.1
Net2K-3_1: 2K-3.1 20K-3.1 | length 5.4
  Bottom Layer w1: 2K-3.1 3.048,26.289 20K-3.1
Net2K-4_1: 2K-4.1 20K-4.1 | length 5.7
  Bottom Layer w1: 2K-4.1 31.75,76.708 20K-4.1
Net2K-5_1: 2K-5.1 20K-5.1 | length 4.8
  Bottom Layer w1: 2K-5.1 32.131,50.673 20K-5.1
Net2K-6_1: 2K-6.1 20K-6.1 | length 5.6
  Bottom Layer w1: 2K-6.1 32.194,29.909 32.194,24.447 20K-6.1
Net2K-7_1: 2K-7.1 20K-7.1 | length 6.6
  Bottom Layer w1: 2K-7.1 61.722,79.693 62.738,78.677 20K-7.1
Net2K-8_1: 2K-8.1 20K-8.1 | length 6.1
  Bottom Layer w1: 2K-8.1 61.912,55.435 61.912,49.466 20K-8.1
Net2K-9_1: 2K-9.1 20K-9.1 | length 5.3
  Bottom Layer w1: 20K-9.1 61.785,24.32 61.785,29.4 2K-9.1
Net2K-10_2: 2K-10.2 "Curent Setting.3" | length 71.5
  Top Layer w1: 2K-10.2 85.217,67.056 82.296,67.056 79.756,64.516 79.756,35.814 82.55,33.02 82.677,33.02 84.709,30.988 84.709,29.718 85.471,28.956 89.203,28.956 89.789,28.37 89.789,16.637 91.186,15.24 93.599,15.24
Net3.2K-1_2: 3.2K-1.2 BD438-1.B TL431-1.1 | length 13.9
  Bottom Layer w1: TL431-1.1 11.557,72.463 15.621,76.527 3.2K-1.2 15.621,76.689 14.859,77.451 BD438-1.B
Net3.2K-2_2: 3.2K-2.2 BD438-2.B TL431-2.1 | length 11.3
  Bottom Layer w1: TL431-2.1 11.557,48.4 15.163,52.006 15.163,52.374 3.2K-2.2 15.24,52.559 15.494,52.813 BD438-2.B
Net3.2K-3_2: 3.2K-3.2 BD438-3.B TL431-3.1 | length 10.8
  Bottom Layer w1: TL431-3.1 11.557,23.508 15.163,27.114 15.163,27.99 3.2K-3.2 15.24,28.175 14.986,28.429 BD438-3.B
Net3.2K-4_2: 3.2K-4.2 BD438-4.B TL431-4.1 | length 13.5
  Bottom Layer w1: TL431-4.1 39.751,74.054 44.233,78.536 45.008,78.536 3.2K-4.2 45.085,78.721 43.815,79.991 BD438-4.B
Net3.2K-5_2: 3.2K-5.2 BD438-5.B TL431-5.1 | length 11.1
  Bottom Layer w1: TL431-5.1 40.259,48.273 43.598,51.612 43.865,51.612 3.2K-5.2 43.942,51.797 44.196,52.051 BD438-5.B
Net3.2K-6_2: 3.2K-6.2 BD438-6.B TL431-6.1 | length 10.6
  Bottom Layer w1: TL431-6.1 40.513,23.187 43.434,26.108 3.2K-6.2 43.434,28.556 44.069,29.191 BD438-6.B
Net3.2K-7_2: 3.2K-7.2 BD438-7.B TL431-7.1 | length 11.4
  Bottom Layer w1: TL431-7.1 70.231,73.86 3.2K-7.2@74.091,77.72 ; 3.2K-7.2 74.168,78.467 74.422,78.721 BD438-7.B
Net3.2K-8_2: 3.2K-8.2 BD438-8.B TL431-8.1 | length 6.1
  Bottom Layer w1: TL431-8.1 71.12,48.908 74.345,52.133 74.345,53.39 3.2K-8.2
Net3.2K-9_2: 3.2K-9.2 BD438-9.B TL431-9.1 | length 9.8
  Bottom Layer w1: TL431-9.1 70.866,23.381 70.916,23.431 71.183,23.431 3.2K-9.2 74.295,26.651 74.93,27.286 BD438-9.B
Net3.3K_1: 3.3K.1 Charging.1 | length 36.8
  Bottom Layer w1: 3.3K.1 Charging.1
Net20K-1_2: 20K-1.2 TL431-1.3 | length 6.4
  Bottom Layer w1: 20K-1.2 8.074,73.406 9.017,72.463 TL431-1.3
Net20K-1_3: 20K-1.3 22K-1.1 | length 4.9
  Bottom Layer w1: 20K-1.3 5.384,68.657 5.384,67.006 22K-1.1
Net20K-2_2: 20K-2.2 TL431-2.3 | length 5.6
  Bottom Layer w1: 20K-2.2 3.463,48.167 8.983,48.167 TL431-2.3
Net20K-2_3: 20K-2.3 22K-2.1 | length 5.1
  Bottom Layer w1: 20K-2.3 6.781,42.241 6.781,41.987 22K-2.1
Net20K-3_2: 20K-3.2 TL431-3.3 | length 5.8
  Bottom Layer w1: 20K-3.2 3.344,23.453 8.967,23.453 9.017,23.403 TL431-3.3
Net20K-3_3: 20K-3.3 22K-3.1 | length 4.6
  Bottom Layer w1: 20K-3.3 3.302,18.396 4.699,16.999 22K-3.1
Net20K-4_2: 20K-4.2 TL431-4.3 | length 5.1
  Bottom Layer w1: 20K-4.2 32.165,73.821 37.177,73.821 TL431-4.3
Net20K-4_3: 20K-4.3 22K-4.1 | length 5.2
  Bottom Layer w1: 20K-4.3 34.721,68.657 34.721,67.26 22K-4.1
Net20K-5_2: 20K-5.2 TL431-5.3 | length 5.4
  Bottom Layer w1: 20K-5.2 34.959,47.879 35.153,48.073 TL431-5.3
Net20K-5_3: 20K-5.3 22K-5.1 | length 5.2
  Bottom Layer w1: 20K-5.3 32.444,45.339 36,41.783 22K-5.1
Net20K-6_2: 20K-6.2 TL431-6.3 | length 6.3
  Bottom Layer w1: 20K-6.2 37.03,21.844 37.973,22.787 TL431-6.3
Net20K-6_3: 20K-6.3 22K-6.1 | length 5.1
  Bottom Layer w1: 20K-6.3 32.3,19.262 32.3,18.119 22K-6.1
Net20K-7_2: 20K-7.2 TL431-7.3 | length 5
  Bottom Layer w1: 20K-7.2 62.78,73.575 67.641,73.575 67.691,73.625 TL431-7.3
Net20K-7_3: 20K-7.3 22K-7.1 | length 4.5
  Bottom Layer w1: 20K-7.3 64.693,69.038 64.693,67.387 22K-7.1
Net20K-8_2: 20K-8.2 TL431-8.3 | length 7.5
  Bottom Layer w1: 20K-8.2 66.935,46.863 68.58,48.508 TL431-8.3
Net20K-8_3: 20K-8.3 22K-8.1 | length 5.4
  Bottom Layer w1: 20K-8.3 64.643,44.323 22K-8.1
Net20K-9_2: 20K-9.2 TL431-9.3 | length 7.3
  Bottom Layer w1: 20K-9.2 67.062,21.717 68.326,22.981 TL431-9.3
Net20K-9_3: 20K-9.3 22K-9.1 | length 5.4
  Bottom Layer w1: 20K-9.3 64.82,16.079 64.82,15.19 22K-9.1
Net47K_1: 47K.1 "Curent Setting.1" | length 6.7
  Bottom Layer w1: 93.599,20.32 93.708,20.429 93.708,21.191 94.869,22.352 47K.1
Net47R-1_2: 47R-1.2 LED-1.1 | length 5
  Bottom Layer w1: LED-1.1@17.286,69.991 LED-1.1 17.272,70.139 18.288,71.155 47R-1.2
Net47R-2_2: 47R-2.2 LED-2.1 | length 3.2
  Bottom Layer w1: LED-2.1 17.907,44.612 18.466,45.171 18.466,47.295 47R-2.2
Net47R-3_2: 47R-3.2 LED-3.1 | length 3.7
  Bottom Layer w1: LED-3.1 15.99,19.038 15.99,19.546 47R-3.2
Net47R-4_2: 47R-4.2 LED-4.1 | length 5
  Bottom Layer w1: LED-4.1 47.244,70.266 48.387,71.409 47R-4.2
Net47R-5_2: 47R-5.2 LED-5.1 | length 4.3
  Bottom Layer w1: LED-5.1 47.498,44.612 47.879,44.993 47R-5.2
Net47R-6_2: 47R-6.2 LED-6.1 | length 3.7
  Bottom Layer w1: LED-6.1 46.863,18.704 47.117,18.958 47R-6.2
Net47R-7_2: 47R-7.2 LED-7.1 | length 3.8
  Bottom Layer w1: LED-7.1 76.581,72.917 76.835,73.171 47R-7.2
Net47R-8_2: 47R-8.2 LED-8.1 | length 3.7
  Bottom Layer w1: 47R-8.2 77.724,47.644 77.978,47.39 LED-8.1
Net47R-9_2: 47R-9.2 LED-9.1 | length 4.1
  Bottom Layer w1: LED-9.1 76.315,17.895 76.315,19.165 47R-9.2
NetCurent(10K)_2: "Curent Setting.2" TL431-10.3 TL431-11.3 TL431-12.3 | length 110.6
  Top Layer w1: TL431-10.3 9.525,1.651 10.414,0.762 40.894,0.762 ; TL431-11.3 40.894,0.762 ; TL431-12.3 70.485,1.524 69.85,0.889 69.723,0.762 ; 93.599,17.78 93.641,17.738 95.673,17.738 97.282,16.129 97.282,13.462 84.582,0.762 69.723,0.762 ; 40.894,0.762 69.723,0.762
pads on no net: ?.1
copper on no net:
  other v1: 5,5 93,5 5,93 93,93

## Silkscreen, mask and mechanical layers (free items; w line width, h text height)
Top Overlay:
  drawing of 58 lines, arcs and shapes, not listed
  text "(18-25v)" at 97.79,82.931 h1.2 r90
  text "[3S-Lipo (12.6v) * 3 ]" at 97.838,36.322 h1 r90
  text "Lipo - Balanced Fast Charger" at 96.017,34.671 h2 r90
  text "10K" at 92.202,17.653 h1.52 r90

## Text inside footprints (layer, text, board x,y; h text height)
1N5400-1: Top Overlay "+" at 11.303,93.472 h1.52 r90; Top Overlay "-" at 14.478,93.599 h1.52 r90
1N5400-2: Top Overlay "+" at 21.463,76.358 h1.52; Top Overlay "-" at 21.59,73.183 h1.52
1N5400-3: Top Overlay "+" at 20.701,87.63 h1.52; Top Overlay "-" at 20.828,84.455 h1.52
1N5400-4: Top Overlay "+" at 22.098,61.087 h1.52; Top Overlay "-" at 22.225,57.912 h1.52
1N5400-5: Top Overlay "+" at 22.352,51.308 h1.52; Top Overlay "-" at 22.479,48.133 h1.52
1N5400-6: Top Overlay "+" at 21.336,35.972 h1.52; Top Overlay "-" at 21.463,32.797 h1.52
1N5400-7: Top Overlay "+" at 21.209,25.558 h1.52; Top Overlay "-" at 21.336,22.383 h1.52
1N5400-8: Top Overlay "+" at 39.497,93.218 h1.52 r90; Top Overlay "-" at 42.672,93.345 h1.52 r90
1N5400-9: Top Overlay "+" at 51.308,87.153 h1.52; Top Overlay "-" at 51.435,83.978 h1.52
1N5400-10: Top Overlay "+" at 51.054,76.835 h1.52; Top Overlay "-" at 51.181,73.66 h1.52
1N5400-11: Top Overlay "+" at 51.562,61.087 h1.52; Top Overlay "-" at 51.689,57.912 h1.52
1N5400-12: Top Overlay "+" at 51.308,50.8 h1.52; Top Overlay "-" at 51.435,47.625 h1.52
1N5400-13: Top Overlay "+" at 51.181,35.337 h1.52; Top Overlay "-" at 51.308,32.162 h1.52
1N5400-14: Top Overlay "+" at 51.181,25.685 h1.52; Top Overlay "-" at 51.308,22.51 h1.52
1N5400-15: Top Overlay "+" at 69.184,93.218 h1.52 r90; Top Overlay "-" at 72.359,93.345 h1.52 r90
1N5400-16: Top Overlay "+" at 79.629,87.122 h1.52; Top Overlay "-" at 79.756,83.947 h1.52
1N5400-17: Top Overlay "+" at 79.502,76.2 h1.52; Top Overlay "-" at 79.629,73.025 h1.52
1N5400-18: Top Overlay "+" at 81.534,60.61 h1.52; Top Overlay "-" at 81.661,57.435 h1.52
1N5400-19: Top Overlay "+" at 81.661,51.435 h1.52; Top Overlay "-" at 81.788,48.26 h1.52
1N5400-20: Top Overlay "+" at 81.153,34.321 h1.52; Top Overlay "-" at 81.28,31.146 h1.52
1N5400-21: Top Overlay "+" at 81.28,24.765 h1.52; Top Overlay "-" at 81.407,21.59 h1.52